# EAGLE board entrance_wall_light (EAGLE 9.6.2)
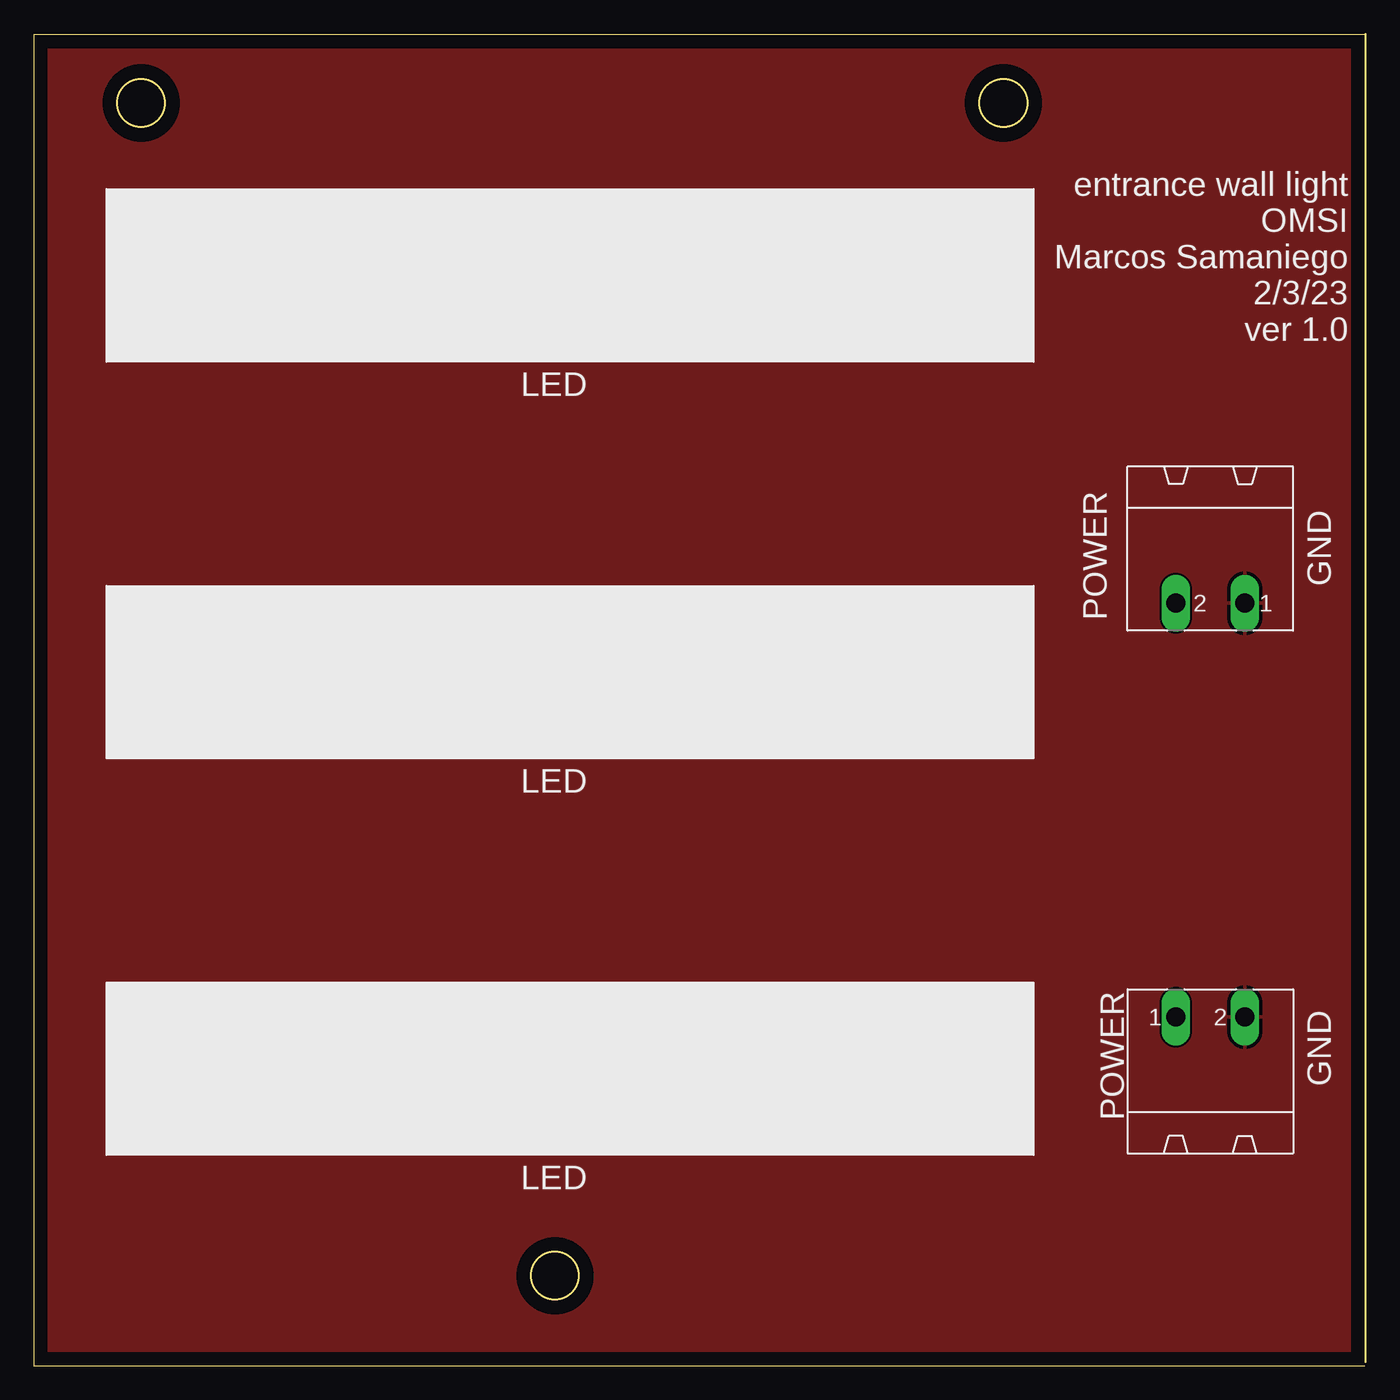
[diagram p0: board, top side]
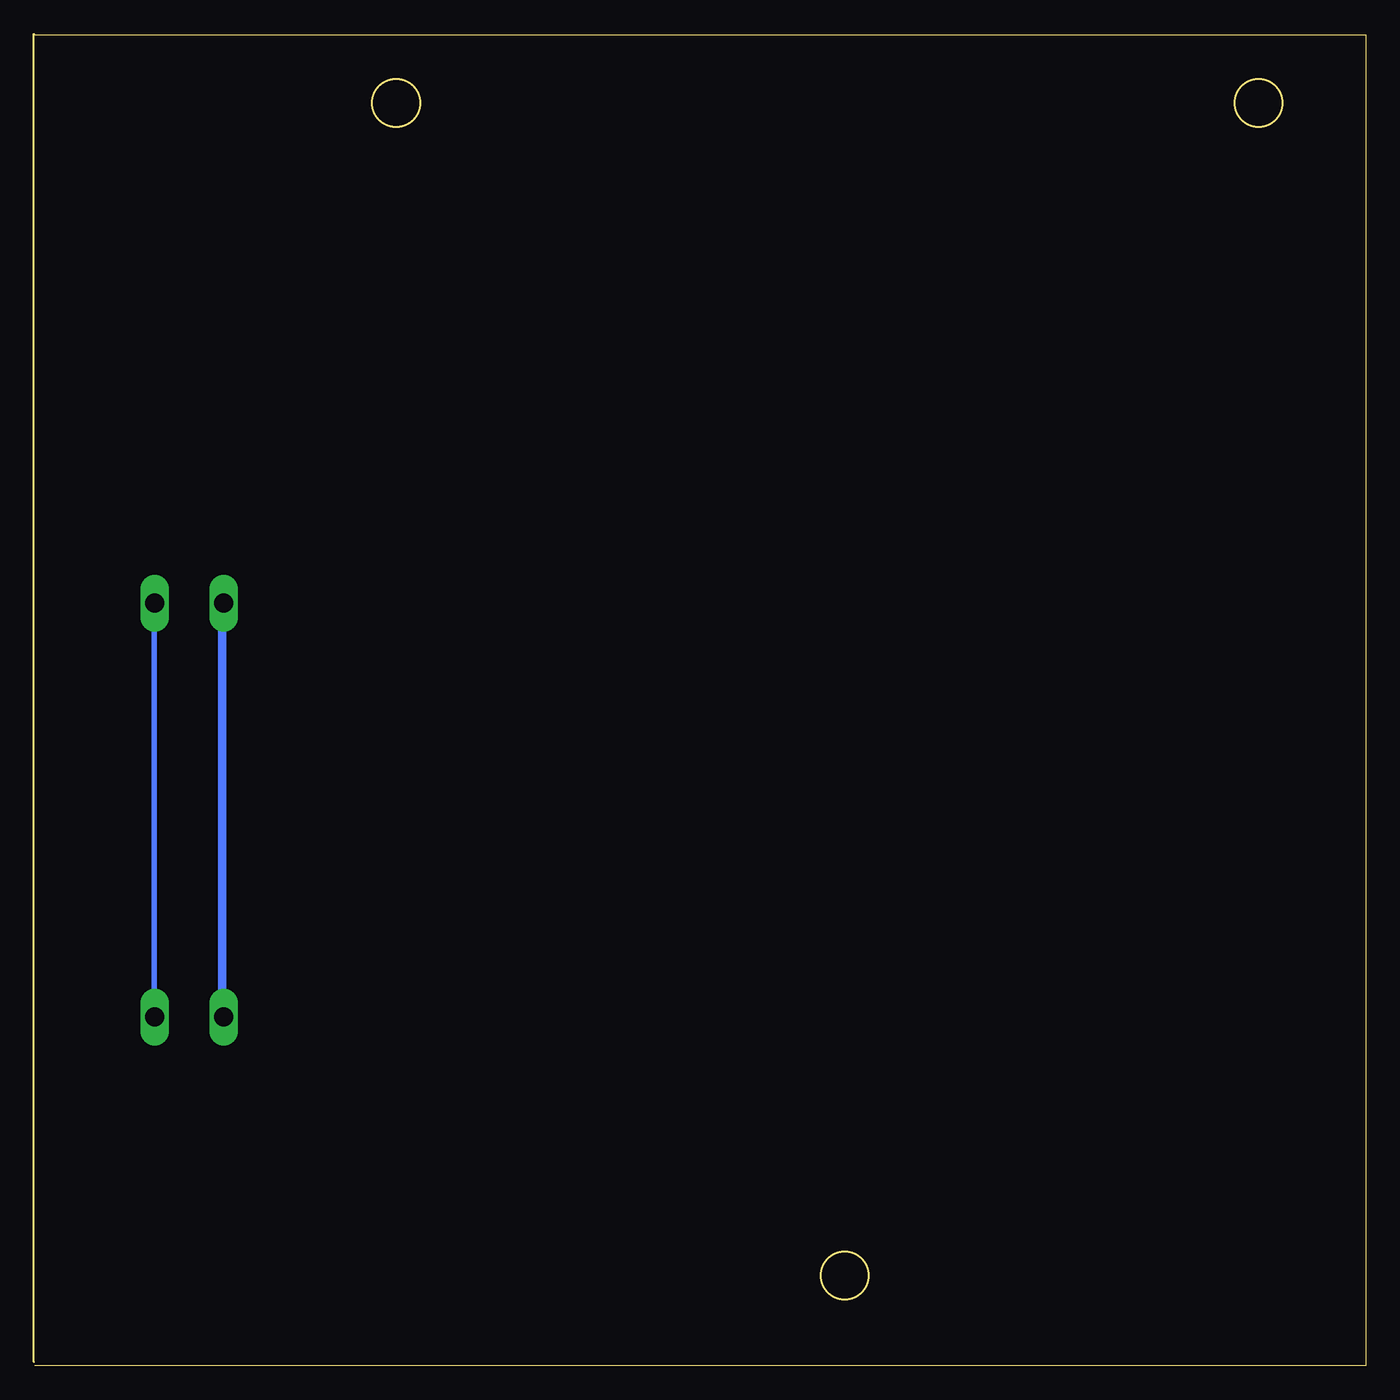
[diagram p1: board, bottom side, seen from below]

Size 98.06 x 98.06 mm. Coordinates in mm from the lower left corner, seen from the top.
Outline: 98,0 0,0 0,98 98,98
Outline: 98.06,0.27 98.06,98.06
Outline: circle at 38.37,6.62 radius 1.75
Outline: circle at 7.89,92.98 radius 1.75
Outline: circle at 71.39,92.98 radius 1.75
Copper layers (1*16): Top 0.035mm / dielectric 1.5mm / Bottom 0.035mm
Design rules "default": minimum track width 6mil, minimum drill 0.35mm, track to track 6mil, track to pad 6mil, pad to pad 6mil, via to via 6mil, smd to smd 6mil, copper to edge 40mil, drill to drill 6mil, minimum pad ring 10mil, minimum via ring 8mil, stop-mask expansion 4mil, vias tented up to drill 0mil, thermal gap 10mil

## Footprints (pad centres in the part's own frame; a part is rotated, then mirrored left to right if it is on the bottom)
MSTBA2 = drill 1.397 long: 1 -2.54,5.08; 2 2.54,5.08

## Placement (x,y rotation side)
X1  MSTBA2  [MSTBA2]  86.63,20.59 0 top
X2  MSTBA2  [MSTBA2]  86.63,61.23 180 top

## Library data of the parts
X1 X2 = con-phoenix-508; MF: FARNELL; MPN: 1757242; OC_FARNELL: 3705171; OC_NEWARK: 71C4161

## Nets
GND: X1.2 X2.1
POWER: X1.1 X2.2

## Tracks (layer width: path | path; a pad name or v marks a point on that pad's centre or on a via)
GND
  Bottom 0.152: 89.22,25.77 X1.2 | 89.22,56.1 X2.1
  Bottom 0.406: 89.22,56.1 89.22,25.77
  pour Top: 0,0 0,98 98,98 98,0
POWER
  Bottom 0.152: 84.19,25.77 X1.1 | 84.19,56.1 X2.2
  Bottom 0.61: 84.19,56.1 84.19,25.77

## Text on the board
tNames: entrance wall light / OMSI / Marcos Samaniego / 2/3/23 / ver 1.0 | LED | GND | POWER | LED | GND | POWER | LED